# EAGLE board PCB 2D Proiect (EAGLE 9.7.0)
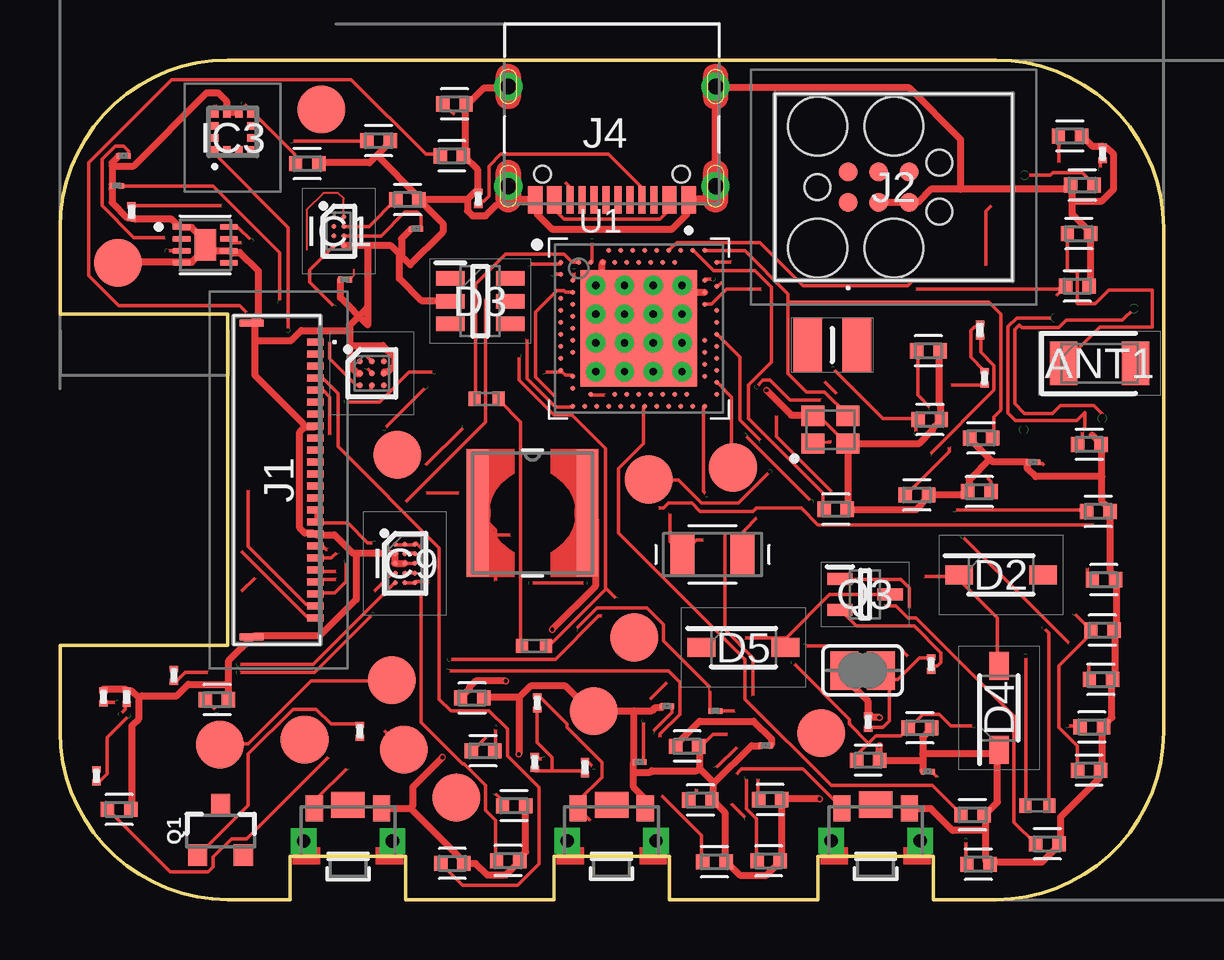
[diagram p0: board, top side]
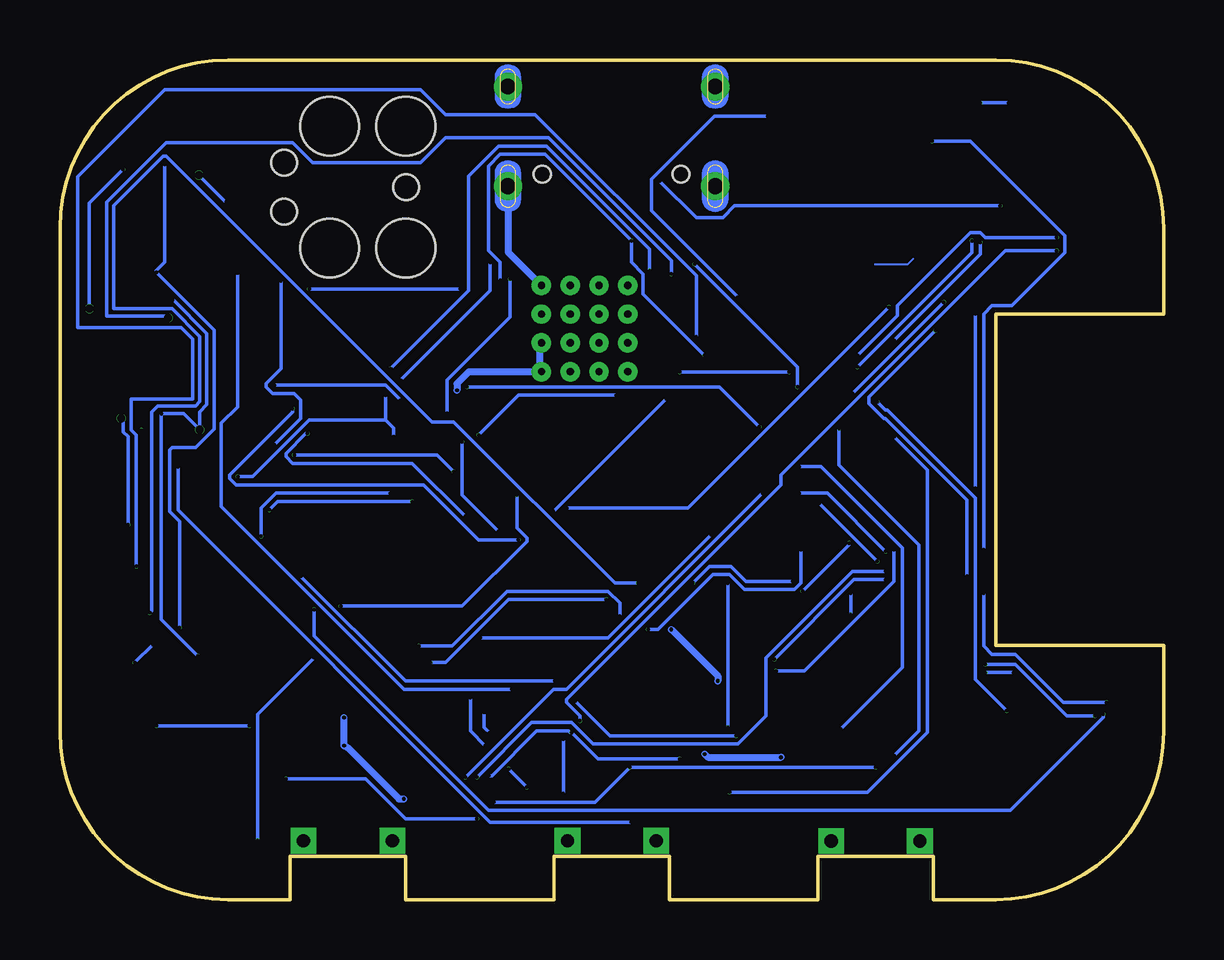
[diagram p1: board, bottom side, seen from below]

Size 46 x 35 mm. Coordinates in mm from the lower left corner, seen from the top.
Outline: 39,0 36.4,0 36.4,1.8 31.6,1.8 31.6,0 25.4,0 25.4,1.8 20.6,1.8 20.6,0 14.4,0 14.4,1.8 9.6,1.8 9.6,0 7,0 arc-90 0,7 0,10.6 7,10.6 7,24.4 0,24.4 0,28 arc-90 7,35 39,35 arc-90 46,28 46,7 arc-90 39,0
Copper layers (1*16): Top 0.035mm / dielectric 1.6mm / Bottom 0.035mm
Design rules "jlcpcb-2layers.dru *": minimum track width 0.14998125mm, minimum drill 0.15mm, track to track 5mil, track to pad 5mil, pad to pad 5mil, via to via 5mil, smd to smd 5mil, copper to edge 0.2mm, drill to drill 6mil, minimum pad ring 10mil, minimum via ring 0.003809375mm, stop-mask expansion 4mil, vias tented up to drill 0mil, thermal gap 10mil
Net classes: 1 Power: width 0.3 mm

## Footprints (pad centres in the part's own frame; a part is rotated, then mirrored left to right if it is on the bottom)
2450AT18B100E_ANTC3216X140N = smd 1.15 x 1.8: 1 -1.5,0; 2 1.5,0
CAPC1005X60 = smd 0.56 x 0.629: 1 -0.485,0; 2 0.485,0
GRM011R60J152KE01L_2_CAPC0201X13N = smd 0.22 x 0.23: 1 -0.185,0; 2 0.185,0
ESP32_C6_LIBRARY_5_SOD3716X135N = smd 1.15 x 0.8: 1 -1.75,0; 2 1.75,0
ESP32_C6_LIBRARY_3_SOT95P280X145-6N = smd 1.2 x 0.6: 1 -1.25,0.95; 2 -1.25,0; 3 -1.25,-0.95; 4 1.25,-0.95; 5 1.25,0; 6 1.25,0.95
BQ25180YBGR_BGA8C40P2X4_100X155X50 = smd 0.2 x 0.2: A1 -0.2,0.6; A2 0.2,0.6; B1 -0.2,0.2; B2 0.2,0.2; C1 -0.2,-0.2; C2 0.2,-0.2; D1 -0.2,-0.6; D2 0.2,-0.6
DRV2605YZFR_BGA9C50P3X3_144X144X62 = smd 0.25 x 0.25: A1 -0.5,0.5; A2 0,0.5; A3 0.5,0.5; B1 -0.5,0; B2 0,0; B3 0.5,0; C1 -0.5,-0.5; C2 0,-0.5; C3 0.5,-0.5
BMA423_BMA423 = smd 0.3 x 0.35: 1 -0.75,-0.775; 2 -0.25,-0.775; 3 0.25,-0.775; 4 0.75,-0.775; 7 0.75,0.775; 8 0.25,0.775; 9 -0.25,0.775; 10 -0.75,0.775 | smd 0.35 x 0.3: 5 0.775,-0.25; 6 0.775,0.25; 11 -0.775,0.25; 12 -0.775,-0.25
RT6160AWSC_BGA15C40P3X5_140X230X60 = smd 0.216 x 0.216: A1 -0.4,0.8; A2 0,0.8; A3 0.4,0.8; B1 -0.4,0.4; B2 0,0.4; B3 0.4,0.4; C1 -0.4,0; C2 0,0; C3 0.4,0; D1 -0.4,-0.4; D2 0,-0.4; D3 0.4,-0.4; E1 -0.4,-0.8; E2 0,-0.8; E3 0.4,-0.8
503480-2400_5034802400 = smd 0.3 x 0.7: 1 -5.75,1.525; 2 -5.25,1.525; 3 -4.75,1.525; 4 -4.25,1.525; 5 -3.75,1.525; 6 -3.25,1.525; 7 -2.75,1.525; 8 -2.25,1.525; 9 -1.75,1.525; 10 -1.25,1.525; 11 -0.75,1.525; 12 -0.25,1.525; 13 0.25,1.525; 14 0.75,1.525; 15 1.25,1.525; 16 1.75,1.525; 17 2.25,1.525; 18 2.75,1.525; 19 3.25,1.525; 20 3.75,1.525; 21 4.25,1.525; 22 4.75,1.525; 23 5.25,1.525; 24 5.75,1.525 | smd 0.3 x 1: MP1 -6.54,-1.125; MP2 6.54,-1.125
TC2030-IDC_TC2030IDC = smd 0.783 x 0.783: 1 -0.953,-0.635; 2 -0.953,0.635; 3 0.317,-0.635; 4 0.317,0.635; 5 1.588,-0.635; 6 1.588,0.635 | hole 2.451: -2.223,-2.54; -2.223,2.54; 0.952,-2.54; 0.952,2.54 | hole 1.067: -2.223,0; 2.857,-1.016; 2.857,1.016
KH-TYPE-C-16P_KINGHELM_KH-TYPE-C-16P = smd 0.6 x 1.15: A1_B12 -3.2,4.725; A4_B9 -2.4,4.725; A9_B4 2.4,4.725; A12_B1 3.2,4.725 | smd 0.3 x 1.15: A5 -1.25,4.725; A6 -0.25,4.725; A7 0.25,4.725; A8 1.25,4.725; B5 1.75,4.725; B6 0.75,4.725; B7 -0.75,4.725; B8 -1.75,4.725 | drill 0.65 pad 1.05: SH1 -4.32,0; SH2 4.32,0; SH3 -4.32,4.15; SH4 4.32,4.15 | hole 0.7: -2.89,3.65; 2.89,3.65
NORDIC_NRF_2_RESC0402_L = smd 0.5 x 0.6: 1 -0.5,0; 2 0.5,0
ESP32_C6_LIBRARY_2_IND_4828-WE-TPC_WRE = smd 0.9 x 5.3: 1 -2.286,0; 2 2.286,0
MLP2016SR47MT0S1_INDC2016X100N = smd 1.2 x 2.2: 1 -1.028,0; 2 1.028,0
ESP32_C6_LIBRARY_4_ESP32_C6_LIBRARY_4_ESP32_C6_LIBRARY_4_ESP32_C6_LIBRARY_4_ESP32_WROVER_SPARKFUN-DISCRETESEMI_SOT23-3 = smd 0.8 x 0.9: 1 -0.95,-1; 2 0.95,-1; 3 0,1.1
ESP32_C6_LIBRARY_6_SOT65P210X110-3N = smd 1.05 x 0.5: 1 -1.05,0.65; 2 -1.05,-0.65; 3 1.05,0
CPF0201D7K68C1_0201 = smd 0.35 x 0.25: 1 0,0.275; 2 0,-0.275
ESP32_C6_LIBRARY_7_JUMPER_SJ = smd 1.168 x 1.6: 1 -0.762,0; 2 0.762,0
2025-10-22_07-23-44_LIBRARY_SW_EVP-AKE31A_PAN = smd 0.711 x 1.092: 1 -1.4,-0.972; 2 1.4,-0.972 | drill 0.559 pad 0.914 square: 3 -1.848,0.381; 4 1.848,0.381 | smd 1.397 x 1.092: 5 0,-1.124
HECTOR_WATCH_1_TP20R = smd 2 x 2: TP 0,0
NORDIC_NRF_4_AQFN50P700X700X85_HS-74N = smd 4.85 x 4.85: P$74 0,0 | drill 0.3 pad 0.6: P$75 -1.8,1.8; P$76 -0.6,1.8; P$77 0.6,1.8; P$78 1.8,1.8; P$79 -1.8,0.6; P$80 -0.6,0.6; P$81 0.6,0.6; P$82 1.8,0.6; P$83 -1.8,-0.6; P$84 -0.6,-0.6; P$85 0.6,-0.6; P$86 1.8,-0.6; P$87 -1.8,-1.8; P$88 -0.6,-1.8; P$89 0.6,-1.8; P$90 1.8,-1.8 | smd 0.2 x 0.2: P$A8 -1.25,3.25; P$A10 -0.75,3.25; P$A12 -0.25,3.25; P$A14 0.25,3.25; P$A16 0.75,3.25; P$A18 1.25,3.25; P$A20 1.75,3.25; P$A22 2.25,3.25; P$A23 2.75,3.25; P$AA24 3.25,-2.25; P$AB2 -2.75,-2.5; P$AC5 -2,-2.75; P$AC9 -1,-2.75; P$AC11 -0.5,-2.75; P$AC13 0,-2.75; P$AC15 0.5,-2.75; P$AC17 1,-2.75; P$AC19 1.5,-2.75; P$AC21 2,-2.75; P$AC24 3.25,-2.75; P$AD2 -2.75,-3.25; P$AD4 -2.25,-3.25; P$AD6 -1.75,-3.25; P$AD8 -1.25,-3.25; P$AD10 -0.75,-3.25; P$AD12 -0.25,-3.25; P$AD14 0.25,-3.25; P$AD16 0.75,-3.25; P$AD18 1.25,-3.25; P$AD20 1.75,-3.25; P$AD22 2.25,-3.25; P$AD23 2.75,-3.25; P$B1 -3.25,2.75; P$B3 -2.5,2.75; P$B5 -2,2.75; P$B7 -1.5,2.75; P$B9 -1,2.75; P$B11 -0.5,2.75; P$B13 0,2.75; P$B15 0.5,2.75; P$B17 1,2.75; P$B19 1.5,2.75; P$B24 3.25,2.75; P$C1 -3.25,2.25; P$D2 -2.75,2; P$D23 2.75,2; P$E24 3.25,1.75; P$F2 -2.75,1.5; P$F23 2.75,1.5; P$G1 -3.25,1.25; P$H2 -2.75,1; P$H23 2.75,1; P$J1 -3.25,0.75; P$J24 3.25,0.75; P$K2 -2.75,0.5; P$L1 -3.25,0.25; P$L24 3.25,0.25; P$M2 -2.75,0; P$N1 -3.25,-0.25; P$N24 3.25,-0.25; P$P2 -2.75,-0.5; P$P23 2.75,-0.5; P$R1 -3.25,-0.75; P$R24 3.25,-0.75; P$T2 -2.75,-1; P$T23 2.75,-1; P$U1 -3.25,-1.25; P$U24 3.25,-1.25; P$V23 2.75,-1.5; P$W1 -3.25,-1.75; P$W24 3.25,-1.75; P$Y2 -2.75,-2; P$Y23 2.75,-2
ESP32_C6_LIBRARY_SON50P200X200X80-9N = smd 0.76 x 0.27: 1 -0.985,0.75; 2 -0.985,0.25; 3 -0.985,-0.25; 4 -0.985,-0.75; 5 0.985,-0.75; 6 0.985,-0.25; 7 0.985,0.25; 8 0.985,0.75 | smd 0.9 x 1.3: 9 0,0
NORDIC_NRF_BT-XTAL_2016_N = smd 0.95 x 0.85: 1 -0.725,-0.575; 2 0.725,-0.575; 3 0.725,0.575; 4 -0.725,0.575
XTAL330X1051X90N = smd 1 x 1.8: 1 -1.25,0; 2 1.25,0

## Placement (x,y rotation side)
ANT1  2450AT18B100E_2450AT18B100E  [2450AT18B100E_ANTC3216X140N]  43.33,22.35 0 top
C1  12pF  [CAPC1005X60]  38.32,17.01 0 top
C1-EP-DR  10uF  [CAPC1005X60]  17.18,8.4 0 top
C2  12pF  [CAPC1005X60]  38.39,19.24 0 top
C2-EP-DR  4.7uF/25V  [CAPC1005X60]  17.63,6.2 0 top
C3  1pF  [CAPC1005X60]  42.41,25.57 0 top
C4  1pF  [CAPC1005X60]  42.1,31.83 0 top
C5  100nF  [CAPC1005X60]  42.91,18.97 0 top
C6  4.7µF  [CAPC1005X60]  6.54,8.33 0 top
C7  100nF  [CAPC1005X60]  38.04,3.53 0 top
C8  100nF  [CAPC1005X60]  41.15,2.32 0 top
C9  820pF  [CAPC1005X60]  26.69,4.14 0 top
C10  100pF  [CAPC1005X60]  43.01,7.19 0 top
C11  100pF  [CAPC1005X60]  43.39,9.17 0 top
C12  100nF  [CAPC1005X60]  32.34,16.27 0 top
C13  100nF  [CAPC1005X60]  35.72,16.87 0 top
C14  4.7µF  [CAPC1005X60]  2.47,3.75 0 top
C15  1.0µF  [CAPC1005X60]  35.84,7.15 0 top
C16  47nF  [CAPC1005X60]  33.69,5.81 0 top
C17  12pF  [CAPC1005X60]  36.25,20.01 0 top
C18  12pF  [CAPC1005X60]  36.2,22.87 0 top
C19  100uF  [CAPC1005X60]  10.31,30.68 0 top
C20  4.7µF  [CAPC1005X60]  43.28,16.18 0 top
C21  4.7µF  [CAPC1005X60]  43.51,13.33 0 top
C22  1pF  [CAPC1005X60]  42.48,27.76 0 top
C23  GRM011R60J152KE01L_2_GRM011R60J152KE01L  [GRM011R60J152KE01L_2_CAPC0201X13N]  27.32,7.86 0 top
C24  10uF  [CAPC1005X60]  42.62,29.78 0 top
C25  22uF  [CAPC1005X60]  43.45,11.23 0 top
C27  GRM011R60J152KE01L_2_GRM011R60J152KE01L  [GRM011R60J152KE01L_2_CAPC0201X13N]  24.16,5.73 0 top
C29  GRM011R60J152KE01L_2_GRM011R60J152KE01L  [GRM011R60J152KE01L_2_CAPC0201X13N]  36.17,5.33 0 top
C30  GRM011R60J152KE01L_2_GRM011R60J152KE01L  [GRM011R60J152KE01L_2_CAPC0201X13N]  25.3,8.06 0 top
C31  GRM011R60J152KE01L_2_GRM011R60J152KE01L  [GRM011R60J152KE01L_2_CAPC0201X13N]  40.56,18.23 0 top
C32  GRM011R60J152KE01L_2_GRM011R60J152KE01L  [GRM011R60J152KE01L_2_CAPC0201X13N]  2.66,31 0 top
C33  22uF  [CAPC1005X60]  42.9,5.39 0 top
C34  GRM011R60J152KE01L_2_GRM011R60J152KE01L  [GRM011R60J152KE01L_2_CAPC0201X13N]  2.38,29.76 0 top
C37  GRM011R60J152KE01L_2_GRM011R60J152KE01L  [GRM011R60J152KE01L_2_CAPC0201X13N]  14.84,27.96 0 top
C38  GRM011R60J152KE01L_2_GRM011R60J152KE01L  [GRM011R60J152KE01L_2_CAPC0201X13N]  11.88,25.84 0 top
C39  10uF  [CAPC1005X60]  14.48,29.18 0 top
C42  GRM011R60J152KE01L_2_GRM011R60J152KE01L  [GRM011R60J152KE01L_2_CAPC0201X13N]  29.41,6.42 0 top
C43  4.7uF  [CAPC1005X60]  26.14,6.39 0 top
D2  ESP32_C6_LIBRARY_5_MBR0530  [ESP32_C6_LIBRARY_5_SOD3716X135N]  39.22,13.54 0 top
D3  ESP32_C6_LIBRARY_3_USBLC6-2SC6Y  [ESP32_C6_LIBRARY_3_SOT95P280X145-6N]  17.52,24.94 0 top
D4  ESP32_C6_LIBRARY_5_MBR0530  [ESP32_C6_LIBRARY_5_SOD3716X135N]  39.14,7.99 90 top
D5  ESP32_C6_LIBRARY_5_MBR0530  [ESP32_C6_LIBRARY_5_SOD3716X135N]  28.49,10.51 0 top
EPD_C1  1uF/50V  [CAPC1005X60]  18.93,3.91 0 top
EPD_C2  1uF/50V  [CAPC1005X60]  16.36,1.51 0 top
EPD_C5  0.1uF/50V  [CAPC1005X60]  18.68,1.62 0 top
EPD_C6  1uF/50V  [CAPC1005X60]  27.28,1.57 0 top
EPD_C7  1uF/50V  [CAPC1005X60]  29.6,4.16 0 top
EPD_C8  1uF/50V  [CAPC1005X60]  29.54,1.61 0 top
EPD_C9  1uF/50V  [CAPC1005X60]  38.29,1.47 0 top
EPD_C10  1uF/50V  [CAPC1005X60]  16.44,33.17 0 top
EPD_C11  1uF/50V  [CAPC1005X60]  16.33,31 0 top
EPD_C12  1uF/50V  [CAPC1005X60]  13.28,31.64 0 top
IC1  BQ25180YBGR_BQ25180YBGR  [BQ25180YBGR_BGA8C40P2X4_100X155X50]  11.62,27.86 0 top
IC2  DRV2605YZFR_DRV2605YZFR  [DRV2605YZFR_BGA9C50P3X3_144X144X62]  13,21.94 0 top
IC3  BMA423_BMA423  [BMA423_BMA423]  7.2,32 0 top
IC9  RT6160AWSC_RT6160AWSC  [RT6160AWSC_BGA15C40P3X5_140X230X60]  14.38,14.01 0 top
J1  503480-2400_503480-2400  [503480-2400_5034802400]  9.12,17.49 270 top
J2  TC2030-IDC_TC2030-IDC  [TC2030-IDC_TC2030IDC]  33.8,29.7 0 top
J4  KH-TYPE-C-16P_KH-TYPE-C-16P  [KH-TYPE-C-16P_KINGHELM_KH-TYPE-C-16P]  23.01,33.89 180 top
L1  3.9nH  [NORDIC_NRF_2_RESC0402_L]  40.75,3.92 0 top
L2  10µH  [NORDIC_NRF_2_RESC0402_L]  17.79,20.87 0 top
L3  15nH  [NORDIC_NRF_2_RESC0402_L]  19.77,10.57 0 top
L5  ESP32_C6_LIBRARY_2_744043680IND_4828-WE-TPC_WRE  [ESP32_C6_LIBRARY_2_IND_4828-WE-TPC_WRE]  19.69,16.12 0 top
L7  MLP2016SR47MT0S1_FTC252012SR47MBCA  [MLP2016SR47MT0S1_INDC2016X100N]  32.19,23.12 0 top
Q1  20V/4.2A/52mΩ/1.4W  [ESP32_C6_LIBRARY_4_ESP32_C6_LIBRARY_4_ESP32_C6_LIBRARY_4_ESP32_C6_LIBRARY_4_ESP32_WROVER_SPARKFUN-DISCRETESEMI_SOT23-3]  6.7,2.85 0 top
Q3  ESP32_C6_LIBRARY_6_SI1308EDL-T1-GE3  [ESP32_C6_LIBRARY_6_SOT65P210X110-3N]  33.56,12.72 0 top
R1_EP_DR  CPF0201D7K68C1_CPF0201D7K68C1  [CPF0201D7K68C1_0201]  36.31,9.81 0 top
R1_USB  CPF0201D7K68C1_CPF0201D7K68C1  [CPF0201D7K68C1_0201]  17.44,29.23 0 top
R2  CPF0201D7K68C1_CPF0201D7K68C1  [CPF0201D7K68C1_0201]  1.52,5.16 0 top
R2_EP_DR  CPF0201D7K68C1_CPF0201D7K68C1  [CPF0201D7K68C1_0201]  2.78,8.44 0 top
R2_USB  CPF0201D7K68C1_CPF0201D7K68C1  [CPF0201D7K68C1_0201]  2.99,28.67 0 top
R3  CPF0201D7K68C1_CPF0201D7K68C1  [CPF0201D7K68C1_0201]  1.81,8.45 0 top
R4  CPF0201D7K68C1_CPF0201D7K68C1  [CPF0201D7K68C1_0201]  4.74,9.34 0 top
R5  CPF0201D7K68C1_CPF0201D7K68C1  [CPF0201D7K68C1_0201]  19.79,5.72 0 top
R7  CPF0201D7K68C1_CPF0201D7K68C1  [CPF0201D7K68C1_0201]  21.89,5.5 0 top
R8  CPF0201D7K68C1_CPF0201D7K68C1  [CPF0201D7K68C1_0201]  19.89,8.2 0 top
R9  CPF0201D7K68C1_CPF0201D7K68C1  [CPF0201D7K68C1_0201]  43.46,31.1 0 top
R17  CPF0201D7K68C1_CPF0201D7K68C1  [CPF0201D7K68C1_0201]  38.35,23.74 0 top
R18  CPF0201D7K68C1_CPF0201D7K68C1  [CPF0201D7K68C1_0201]  38.54,21.75 0 top
R_PWR_EPD  CPF0201D7K68C1_CPF0201D7K68C1  [CPF0201D7K68C1_0201]  12.5,7.01 0 top
R_TYPE_SEL  CPF0201D7K68C1_CPF0201D7K68C1  [CPF0201D7K68C1_0201]  33.69,7.4 0 top
SJ1  [ESP32_C6_LIBRARY_7_JUMPER_SJ]  33.46,9.55 0 top
SW_DN  2025-10-22_07-23-44_LIBRARY_EVP-AKE31ASW_EVP-AKE31A_PAN  [2025-10-22_07-23-44_LIBRARY_SW_EVP-AKE31A_PAN]  12,2.83 180 top
SW_ENT  2025-10-22_07-23-44_LIBRARY_EVP-AKE31ASW_EVP-AKE31A_PAN  [2025-10-22_07-23-44_LIBRARY_SW_EVP-AKE31A_PAN]  23,2.83 180 top
SW_UP  2025-10-22_07-23-44_LIBRARY_EVP-AKE31ASW_EVP-AKE31A_PAN  [2025-10-22_07-23-44_LIBRARY_SW_EVP-AKE31A_PAN]  34,2.83 180 top
TP_3.3V  HECTOR_WATCH_1_TPTP20R  [HECTOR_WATCH_1_TP20R]  16.52,4.25 0 top
TP_BAT_GND  HECTOR_WATCH_1_TPTP20R  [HECTOR_WATCH_1_TP20R]  22.25,7.86 0 top
TP_GND  HECTOR_WATCH_1_TPTP20R  [HECTOR_WATCH_1_TP20R]  2.42,26.55 0 top
TP_ON  HECTOR_WATCH_1_TPTP20R  [HECTOR_WATCH_1_TP20R]  31.72,6.95 0 top
TP_OP  HECTOR_WATCH_1_TPTP20R  [HECTOR_WATCH_1_TP20R]  10.9,32.95 0 top
TP_RESET  HECTOR_WATCH_1_TPTP20R  [HECTOR_WATCH_1_TP20R]  14.07,18.54 0 top
TP_SCL  HECTOR_WATCH_1_TPTP20R  [HECTOR_WATCH_1_TP20R]  24.54,17.51 0 top
TP_SDA  HECTOR_WATCH_1_TPTP20R  [HECTOR_WATCH_1_TP20R]  14.34,6.25 0 top
TP_SWDCLK  HECTOR_WATCH_1_TPTP20R  [HECTOR_WATCH_1_TP20R]  28.05,18.01 0 top
TP_SWDIO  HECTOR_WATCH_1_TPTP20R  [HECTOR_WATCH_1_TP20R]  23.93,10.93 0 top
TP_SWO  HECTOR_WATCH_1_TPTP20R  [HECTOR_WATCH_1_TP20R]  6.67,6.45 0 top
TP_VBAT  HECTOR_WATCH_1_TPTP20R  [HECTOR_WATCH_1_TP20R]  10.2,6.67 0 top
TP_VREG  HECTOR_WATCH_1_TPTP20R  [HECTOR_WATCH_1_TP20R]  13.84,9.14 0 top
U1  NORDIC_NRF_4_NRF52840_QF  [NORDIC_NRF_4_AQFN50P700X700X85_HS-74N]  24.13,23.8 0 top
U3  ESP32_C6_LIBRARY_MAX17048G+T10  [ESP32_C6_LIBRARY_SON50P200X200X80-9N]  6.06,27.29 0 top
X1  32MHZ  [NORDIC_NRF_BT-XTAL_2016_N]  32.11,19.58 0 top
X2  FC-135  [XTAL330X1051X90N]  27.2,14.39 0 top

## Library data of the parts
ANT1 = InkTime_v5; ARROW_PART_NUMBER: 2450AT18B100E; ARROW_PRICE-STOCK: https://www.arrow.com/en/products/2450at18b100e/johanson-dielectrics?utm_currency=USD&region=nac; DESCRIPTION: Antennas 2.45GHz ANTENNA; HEIGHT: 1.4mm; MANUFACTURER_NAME: JOHANSON TECHNOLOGY; MANUFACTURER_PART_NUMBER: 2450AT18B100E; MOUSER_PART_NUMBER: 609-2450AT18B100E; MOUSER_PRICE-STOCK: https://www.mouser.co.uk/ProductDetail/Johanson-Technology/2450AT18B100E?qs=yCnrNFeXz%252Bh5MFsFIXGZGA%3D%3D
C1 C1-EP-DR C2 C2-EP-DR C3-C22 C24 C25 C33 C39 C43 EPD_C1 EPD_C2 EPD_C5-EPD_C12 = Tinkercad; CATEGORY: Capacitor
C23 C27 C34 C42 = InkTime_v5; AVAILABILITY: In Stock; CAP: 0.1uF; CHECK_PRICES: https://www.snapeda.com/parts/GRM011R60J152KE01L/Murata/view-part/?ref=eda; DESCRIPTION: SMD Capacitor X5R(EIA) with Capacitance: 1500pF Tol. 10%. Rated Voltage: 6.3Vdc; MF: Murata; MP: GRM011R60J152KE01L; PACKAGE: 0201 Murata; PRICE: None; SNAPEDA_LINK: https://www.snapeda.com/parts/GRM011R60J152KE01L/Murata/view-part/?ref=snap
C29-C32 C37 C38 = InkTime_v5; AVAILABILITY: In Stock; CAP: 1uF; CHECK_PRICES: https://www.snapeda.com/parts/GRM011R60J152KE01L/Murata/view-part/?ref=eda; DESCRIPTION: SMD Capacitor X5R(EIA) with Capacitance: 1500pF Tol. 10%. Rated Voltage: 6.3Vdc; MF: Murata; MP: GRM011R60J152KE01L; PACKAGE: 0201 Murata; PRICE: None; SNAPEDA_LINK: https://www.snapeda.com/parts/GRM011R60J152KE01L/Murata/view-part/?ref=snap
D2 D4 D5 = InkTime_v5; AVAILABILITY: In Stock; CHECK_PRICES: https://www.snapeda.com/parts/MBR0530/Onsemi/view-part/?ref=eda; DESCRIPTION: Diode Schottky 30 V 500mA Surface Mount SOD-123; MF: ON Semiconductor; MP: MBR0530; PACKAGE: SOD-123-2 ON Semiconductor; PRICE: None; PURCHASE-URL: https://www.snapeda.com/api/url_track_click_mouser/?unipart_id=179458&manufacturer=ON Semiconductor&part_name=MBR0530&search_term=None; SHORT_NAME: MBR0530; SNAPEDA_LINK: https://www.snapeda.com/parts/MBR0530/Onsemi/view-part/?ref=snap
D3 = InkTime_v5; AVAILABILITY: In Stock; CHECK_PRICES: https://www.snapeda.com/parts/USBLC6-2SC6Y/STMicroelectronics/view-part/?ref=eda; DESCRIPTION: 17V Clamp 5A (8/20µs) Ipp Tvs Diode Surface Mount SOT-23-6; MF: STMicroelectronics; MP: USBLC6-2SC6Y; PACKAGE: SOT-23-6 STMicroelectronics; PRICE: None; SHORT_NAME: USBLC6-2SC6Y; SNAPEDA_LINK: https://www.snapeda.com/parts/USBLC6-2SC6Y/STMicroelectronics/view-part/?ref=snap
IC1 = InkTime_v5; ARROW_PART_NUMBER: BQ25180YBGR; ARROW_PRICE-STOCK: https://www.arrow.com/en/products/bq25180ybgr/texas-instruments?utm_currency=USD&region=nac; DESCRIPTION: Charger IC Lithium Ion/Polymer, Lithium Iron Phosphate 8-DSBGA (1.6x1.1); HEIGHT: 0.5mm; MANUFACTURER_NAME: Texas Instruments; MANUFACTURER_PART_NUMBER: BQ25180YBGR; MOUSER_PART_NUMBER: 595-BQ25180YBGR; MOUSER_PRICE-STOCK: https://www.mouser.co.uk/ProductDetail/Texas-Instruments/BQ25180YBGR?qs=doiCPypUmgEWjAK%252BJAX6Tw%3D%3D
IC2 = InkTime_v5; ARROW_PART_NUMBER: DRV2605YZFR; ARROW_PRICE-STOCK: https://www.arrow.com/en/products/drv2605yzfr/texas-instruments?region=nac; DESCRIPTION: Haptic Driver for ERM/LRA with Built-In Library and Smart Loop Architecture; HEIGHT: 0.625mm; MANUFACTURER_NAME: Texas Instruments; MANUFACTURER_PART_NUMBER: DRV2605YZFR; SHORT_NAME: DRV2605YZFR
IC3 = InkTime_v5; ARROW_PART_NUMBER: BMA423; ARROW_PRICE-STOCK: https://www.arrow.com/en/products/bma423/bosch; DESCRIPTION: Accelerometers Triaxial low-g 12bit Acceleration Sensor; HEIGHT: 1mm; MANUFACTURER_NAME: BOSCH; MANUFACTURER_PART_NUMBER: BMA423; MOUSER_PART_NUMBER: 262-BMA423; MOUSER_PRICE-STOCK: https://www.mouser.co.uk/ProductDetail/Bosch-Sensortec/BMA423?qs=HXFqYaX1Q2xC%252BSgeGoX3mg%3D%3D
IC9 = InkTime_v5; DESCRIPTION: Buck-Boost Regulator Positive Output Step-Up/Step-Down I2C DC-DC Controller IC 15-WL-CSP (BSC) (1.4x2.3); HEIGHT: 0.6mm; MANUFACTURER_NAME: RICHTEK; MANUFACTURER_PART_NUMBER: RT6160AWSC; MOUSER_PART_NUMBER: 835-RT6160AWSC; MOUSER_PRICE-STOCK: https://www.mouser.co.uk/ProductDetail/Richtek/RT6160AWSC?qs=amGC7iS6iy%2FLd9PSoixZXQ%3D%3D
J1 = InkTime_v5; DESCRIPTION: FFC & FPC Connectors 0.5mm FPC RA SMT Dual Contact 24Ckt; HEIGHT: 1.87mm; MANUFACTURER_NAME: Molex; MANUFACTURER_PART_NUMBER: 503480-2400; MOUSER_PART_NUMBER: 538-503480-2400; MOUSER_PRICE-STOCK: https://www.mouser.co.uk/ProductDetail/Molex/503480-2400?qs=OAhjpuo3Vu7efIoxFh9AOw%3D%3D
J2 = InkTime_v5; DESCRIPTION: CABLE ADAPTER 6 POS; HEIGHT: 19mm; MANUFACTURER_NAME: Tag Connect; MANUFACTURER_PART_NUMBER: TC2030-IDC
J4 = InkTime_v5; AVAILABILITY: Not in stock; CHECK_PRICES: https://www.snapeda.com/parts/KH-TYPE-C-16P/Kinghelm/view-part/?ref=eda; MF: kinghelm; MP: KH-TYPE-C-16P; PACKAGE: None; PRICE: None; SHORT_NAME: KH-TYPE-C-16P; SNAPEDA_LINK: https://www.snapeda.com/parts/KH-TYPE-C-16P/Kinghelm/view-part/?ref=snap
L1-L3 SJ1 TP_3.3V TP_BAT_GND TP_GND TP_ON TP_OP TP_RESET TP_SCL TP_SDA TP_SWDCLK TP_SWDIO TP_SWO TP_VBAT TP_VREG U1 X1 = InkTime_v5
L5 = InkTime_v5; COPYRIGHT: Copyright (C) 2024 Ultra Librarian. All rights reserved.; MANUFACTURER_PART_NUMBER: 744043680; MFR_NAME: Wurth Electronics; VAL: 68uH
L7 = InkTime_v5; DESCRIPTION: SMD / SMT Inductors (Coils), L=0.47?H, L x W x T :; HEIGHT: 1mm; JLCPCB: https://jlcpcb.com/partdetail/6763488-FTC252012SR47MBCA/C5832368; MANUFACTURER_NAME: TDK; MANUFACTURER_PART_NUMBER: FTC252012SR47MBCA; SHORT_NAME: FTC252012SR47MBCA
Q1 = InkTime_v5; PROD_ID: TRAN-14388; SHORT_NAME: DMG2305UX-7
Q3 = InkTime_v5; AVAILABILITY: In Stock; CHECK_PRICES: https://www.snapeda.com/parts/SI1308EDL-T1-GE3/Vishay+Siliconix/view-part/?ref=eda; DESCRIPTION: Si1308EDL-T1-GE3 N-channel MOSFET Transistor, 1.5 A, 30 V, 3-Pin SC-70 | Siliconix / Vishay SI1308EDL-T1-GE3; MF: Vishay Siliconix; MP: SI1308EDL-T1-GE3; PACKAGE: SOT-323 Vishay Semiconductor; PRICE: None; PURCHASE-URL: https://www.snapeda.com/api/url_track_click_mouser/?unipart_id=274603&manufacturer=Vishay Siliconix&part_name=SI1308EDL-T1-GE3&search_term=None; SHORT_NAME: SI1308EDL-T1-GE3; SNAPEDA_LINK: https://www.snapeda.com/parts/SI1308EDL-T1-GE3/Vishay+Siliconix/view-part/?ref=snap
R1_EP_DR = InkTime_v5; VAL: 0.47
R1_USB R2_USB = InkTime_v5; VAL: 5K1
R2-R4 = InkTime_v5; VAL: 0
R2_EP_DR R5 R7-R9 R_PWR_EPD = InkTime_v5; VAL: 10K
R17 R18 = InkTime_v5; VAL: 3K3
R_TYPE_SEL = InkTime_v5; VAL: 2.2
SW_DN SW_ENT SW_UP = InkTime_v5; COPYRIGHT: Copyright (C) 2025 Ultra Librarian. All rights reserved.; DIGI-KEY_PART_NUMBER_1: P123437TR-ND; DIGI-KEY_PART_NUMBER_2: P123437CT-ND; DIGI-KEY_PART_NUMBER_3: P123437DKR-ND; MANUFACTURER_NAME: Panasonic; MANUFACTURER_PART_NUMBER: EVP-AKE31A
U3 = InkTime_v5; AVAILABILITY: In Stock; CHECK_PRICES: https://www.snapeda.com/parts/MAX17048G+T10/Analog+Devices/view-part/?ref=eda; DESCRIPTION: 3µA 1-Cell/2-Cell Fuel Gauge with ModelGauge; MF: Analog Devices; MP: MAX17048G+T10; PACKAGE: TDFN-8 Maxim; PRICE: None; PURCHASE-URL: https://www.snapeda.com/api/url_track_click_mouser/?unipart_id=329239&manufacturer=Analog Devices&part_name=MAX17048G+T10&search_term=None; SHORT_NAME: MAX17048G+T10; SNAPEDA_LINK: https://www.snapeda.com/parts/MAX17048G+T10/Analog+Devices/view-part/?ref=snap
X2 = Frequency-Source; CATEGORY: Crystals; DATASHEET: https://download.epsondevice.com/td/pdf/app/FC-135_en.pdf; DESCRIPTION: 32.768 kHz ±20 ppm Crystal 12.5 pF 70 kOhms 2-SMD No Lead; FREQUENCY: 32.768 kHz; FREQUENCY_STABILITY: NA; LOAD_CAPACITANCE: 12.5 pF; MANUFACTURER: EPSON; MPN: FC-135 32.7680KA-A5; OPERATING_TEMPERATURE: -40°C ~ 85°C; PACKAGE_SIZE: 2-SMD No Lead; PACKAGE_TYPE: Surface Mount; PART_STATUS: Active; ROHS: Compliant; SERIES: FC-135; SUBCATEGORY: Oscillators; TOLERANCE: ±20 ppm; TYPE: Resonators

## Nets
3V3/1.7D [Power]: Q1.2
3V3/2.4A [Power]: TP_3.3V.TP
ALERT/1.6C: U3.5
ALERT/2.5C: U1.P$J24
D+/1.5D: D3.4
D+/2.7D: U1.P$AD6
D-/1.5D: D3.6
D-/2.7D: U1.P$AD4
DN: D3.1
DP: D3.3
EPD_3V3 [Power]: C1-EP-DR.1 L5.2
EPD_BUSY/1.5D: J1.9
EPD_BUSY/2.2D: U1.P$AD12
EPD_CS/1.4C: J1.12
EPD_CS/2.2D: U1.P$K2
EPD_DC/1.5D: J1.11
EPD_DC/2.2D: U1.P$AD10
EPD_RST/1.5D: J1.10
EPD_RST/2.2D: U1.P$AC11
GDR: Q3.1 R2_EP_DR.2
GND [Power]: C1-EP-DR.2 C1.1 C2.1 C3.2 C4.2 C5.2 C6.2 C7.2 C8.2 C9.2 C10.2 C11.2 C12.2 C13.2 C14.2 C15.2 C16.2 C17.2 C18.2 C19.2 C20.2 C21.2 C22.2 C23.2 C24.1 C25.2 C27.1 C29.1 C30.1 C31.1 C32.1 C33.2 C34.1 C37.1 C38.1 C39.2 C42.1 C43.2 D3.2 D4.1 EPD_C1.2 EPD_C2.2 EPD_C5.2 EPD_C6.2 EPD_C7.2 EPD_C8.2 EPD_C9.2 EPD_C10.2 EPD_C11.2 EPD_C12.2 IC1.D2 IC2.B1 IC2.B3 IC3.8 IC3.9 IC9.B1 IC9.C1 IC9.C2 IC9.C3 J1.8 J1.17 J1.MP1 J1.MP2 J2.3 J2.5 J4.A1_B12 J4.A12_B1 J4.SH1 J4.SH2 J4.SH3 J4.SH4 R1_USB.1 R2_EP_DR.1 R2_USB.2 R3.1 R9.1 R_TYPE_SEL.1 SJ1.1 SW_DN.1 SW_ENT.1 SW_UP.1 TP_BAT_GND.TP TP_GND.TP U1.P$74 U1.P$75 U1.P$76 U1.P$77 U1.P$78 U1.P$79 U1.P$80 U1.P$81 U1.P$82 U1.P$83 U1.P$84 U1.P$85 U1.P$86 U1.P$87 U1.P$88 U1.P$89 U1.P$90 U1.P$B7 U1.P$F23 U3.1 U3.4 U3.6 U3.9 X1.2 X1.4
HAPTIC_EN/1.4C: IC2.A1
HAPTIC_EN/2.6A: U1.P$U1
IMU_INT1: IC3.5
IMU_INT2: IC3.6
LX1: L7.1
LX2: L7.2
MOSI/1.5B: J1.14
MOSI/2.2D: U1.P$B13
N$1: IC9.D1 R4.2
N$2: IC1.D1 R9.2
N$3: R4.1
N$4: IC9.D2 IC9.D3
N$5: IC9.E1 R2.2
N$6: C25.1 C33.1 IC9.E2 IC9.E3
N$7: R17.1 R18.1
N$8: IC9.B2 IC9.B3
N$9: C23.1 C24.2 IC9.A1 IC9.A2 IC9.A3
N$10: R17.2 TP_SCL.TP
N$11: R18.2 TP_SDA.TP
N$12: IC3.3
N$13: IC3.2
N$14: IC3.1 R3.2
N$15: IC3.12
N$16: J2.1
N$17: C19.1 IC3.7 IC3.10
N$18: J2.2
N$19: J2.6
N$20: J2.4
N$21: C8.1 U1.P$AD23
N$23: U1.P$AC24
N$24: C9.1 U1.P$N24
N$25: C2.2 U1.P$A23 X1.3
N$26: C3.1 L1.1 U1.P$H23
N$27: ANT1.1 C4.1 C22.1 L1.2
N$28: C2-EP-DR.2 D5.2 L5.1 Q3.3
N$29: C1.2 U1.P$B24 X1.1
N$30: C11.1 U1.P$D23
N$31: U1.P$AD22
N$32: C20.1 U1.P$AC5
N$33: C6.1 U1.P$W1 U1.P$Y2
N$34: C14.1 U1.P$B1
N$35: U1.P$T2
N$36: C12.1 U1.P$A22
N$37: U1.P$P2
N$38: U1.P$N1
N$39: C7.1 U1.P$AD14
N$40: U1.P$AC13
N$41: U1.P$M2
N$42: U1.P$L1
N$43: L2.2 L3.1
N$44: C10.1 C15.1 C16.1 L3.2 U1.P$B5 U1.P$E24
N$45: C13.1 U1.P$A18
N$46: C2-EP-DR.1 D2.1 D4.2
N$47: C18.1 U1.P$F2 X2.1
N$48: C21.1 U1.P$AD2
N$49: C17.1 U1.P$D2 X2.2
N$50: C5.1 U1.P$C1
N$51: R2.1
N$52: R1_EP_DR.1 R_TYPE_SEL.2 SJ1.2
N$53: R_PWR_EPD.2
N$54: J1.2
N$55: Q1.3
N$56: J1.3
N$57: EPD_C2.1 J1.4
N$58: EPD_C1.1 J1.5
N$59: J4.A4_B9 J4.A9_B4
N$60: C27.2 U3.2 U3.3
N$61: J4.B7
N$62: L2.1 U1.P$B3
N$63: J4.B6
N$64: D3.5
N$65: J4.B5 R2_USB.1
N$66: J4.A5 R1_USB.2
N$67: J4.A6
N$68: EPD_C5.1 J1.15 J1.16
N$69: J4.A7
N$70: EPD_C6.1 J1.18
N$71: EPD_C7.1 J1.19
N$72: EPD_C8.1 J1.20
N$73: EPD_C9.1 J1.21
N$74: EPD_C10.1 J1.22
N$75: EPD_C11.1 J1.23
N$76: EPD_C12.1 J1.24
N$78: C34.2 IC2.C2
N$79: IC2.C3
N$81: C32.2 IC2.A2
N$82: IC2.A3
N$84: R5.2 R7.2 R8.2
OUT+: TP_OP.TP
OUT-: TP_ON.TP
P0.04: U1.P$J1
P0.09: U1.P$L24
P0.13/1.5D: C30.2 R5.1 SW_UP.2
P0.13/2.6C: U1.P$AD8
P0.14/1.5D: C31.2 R8.1 SW_ENT.2
P0.14/2.7C: U1.P$AC9
P0.19: U1.P$AC15
P0.20: U1.P$AD16
P0.21: U1.P$AC17
P0.22: U1.P$AD18
P0.23: U1.P$AC19
P0.24: U1.P$AD20
P0.25: U1.P$AC21
P0.26: U1.P$G1
P0.27: U1.P$H2
P0.28: U1.P$B11
P0.29: U1.P$A10
P0.30: U1.P$B9
P0.31: U1.P$A8
P1.01/1.6C: Q1.1 R_PWR_EPD.1
P1.01/2.4B: U1.P$Y23
P1.02/1.6C: C29.2 R7.1 SW_DN.2
P1.02/2.8C: U1.P$W24
P1.03: U1.P$V23
P1.04: U1.P$U24
P1.05: U1.P$T23
P1.06: U1.P$R24
P1.07: U1.P$P23
P1.09: U1.P$R1
P1.10: U1.P$A20
P1.11: U1.P$B19
P1.12: U1.P$B17
P1.13: U1.P$A16
P1.14: U1.P$B15
P1.15: U1.P$A14
PMIC_INT: IC1.A1
PREVGH: D5.1
PREVGL: D2.2
RESE: Q3.2 R1_EP_DR.2
RESET: TP_RESET.TP
SCK/1.5B: J1.13
SCK/2.2D: U1.P$A12
SCL/1.4C: IC2.C1 U3.7
SCL/2.4C: IC1.B1
SDA/1.4C: IC2.B2 U3.8
SDA/2.4C: IC1.C1
SWDCLK: TP_SWDCLK.TP U1.P$AA24
SWDIO: TP_SWDIO.TP
SWO: TP_SWO.TP TP_VREG.TP
VBAT/1.2A [Power]: TP_VBAT.TP
VBAT/2.5C [Power]: C37.2 IC1.C2
VBUS/1.5D [Power]: C42.2 C43.1
VBUS/2.6D [Power]: C38.2 IC1.A2
VREG [Power]: C39.1 IC1.B2

## Tracks (layer width: path | path; a pad name or v marks a point on that pad's centre or on a via)
EPD_3V3  (via drill 0.15)
  Top 0.3: v18.58,9.11 17.33,9.11 17.05,8.84 17.05,8.77 16.71,8.42 C1-EP-DR.1 | v20.52,11.26 22.32,13.06 22.32,15.83 22.04,16.11 L5.2
  Bottom 0.3: v18.58,9.11 18.58,9.32 v20.52,11.26
GDR  (via drill 0.15)
  Top 0.15: v2.51,7.73 2.72,7.94 2.72,8.14 R2_EP_DR.2 | v35.4,12.09 35.4,12.99 35.06,13.34 32.57,13.34 Q3.1
  Bottom 0.15: v2.51,7.73 2.51,7.59 6.39,3.71 28.13,3.71 35.4,10.98 v35.4,12.09
GND  (via drill 0.15, 0.35)
  Top 0.152: C23.2 28.27,7.86 v28.32,7.91 | v28.02,6.88 27.22,6.88 26.68,6.34 | IC9.C2 IC9.C3 | X1.2 32.78,19.01 31.63,20.16
  Top 0.3: v29.45,21.23 30.49,20.19 31.39,20.19 X1.4 31.63,20.16 | U1.P$B7 22.59,26.49 22.59,25.87 22.39,25.66 U1.P$74 | 25.99,25.59 26.26,25.32 26.82,25.32 U1.P$F23 | U1.P$74 22.39,23.17 22.39,22.06 U1.P$87 22.52,22.06 23.49,22.06 U1.P$88 23.63,22.06 24.67,22.06 U1.P$89 | U1.P$83 22.39,23.24 U1.P$74 | U1.P$79 22.39,24.42 22.94,24.97 U1.P$74 | U1.P$75 22.39,25.59 U1.P$74 | U1.P$84 23.49,23.24 23.36,23.38 U1.P$74 | U1.P$85 24.67,23.24 24.19,23.72 U1.P$74 | U1.P$80 23.56,24.42 U1.P$74 | U1.P$76 23.49,25.59 23.01,25.11 U1.P$74 | U1.P$81 24.74,24.42 U1.P$74 | U1.P$77 24.74,25.59 25.29,25.04 U1.P$74 | U1.P$74 25.43,24.9 25.92,24.42 U1.P$82 25.99,24.28 25.99,23.24 U1.P$86 | 25.99,25.59 U1.P$78 | 25.99,25.59 U1.P$74 | 17.4,29.54 17.4,30.44 16.85,30.99 EPD_C11.2 16.92,31.13 16.92,33.14 EPD_C10.2 17.05,33.21 17.68,33.83 18.65,33.83 J4.SH2 | 17.4,29.54 R1_USB.1 | 16.99,29.19 16.99,28.71 17.19,28.5 17.75,28.5 18.72,29.47 J4.SH4 18.72,29.68 19.2,29.19 19.75,29.19 J4.A12_B1 19.89,29.06 19.89,28.57 20.52,27.95 25.5,27.95 26.13,28.57 26.13,29.06 J4.A1_B12 26.26,29.19 26.82,29.19 27.3,29.68 J4.SH3 27.3,29.89 27.3,33.83 J4.SH1 27.44,33.83 35.4,33.83 37.55,31.69 37.55,29.61 | 16.99,29.19 17.26,29.47 17.4,29.54 | 13.21,31.03 13.8,31.62 EPD_C12.2 | 13.21,31.03 12.9,30.72 10.82,30.72 C19.2 | 12.83,27.26 13.8,27.26 14.15,26.91 | 12.83,27.26 11.86,27.26 IC1.D2 | 14.24,26.82 14.59,26.46 15.96,27.83 15.96,28.18 C39.2 | 14.24,26.82 14.15,26.91 | 12.83,27.26 12.83,24.76 | 12.83,24.76 12.83,23.96 11.7,25.09 C38.1 | 12.07,23.72 12.07,23.93 12.76,24.62 12.83,24.76 | 12.07,23.72 12.07,23.1 | 12.07,23.1 12.07,22.27 12.42,21.92 12.48,21.92 IC2.B1
  Top 0.3: 12.07,23.1 13.45,23.1 13.94,22.62 13.94,22.27 13.66,21.99 13.52,21.99 IC2.B3 | D3.2 16.22,24.97 15.06,24.97 14.15,25.88 14.15,26.91 | C37.1 14.24,27.54 14.24,26.82 | 13.21,31.03 14.98,29.26 C39.2 | 16.99,29.19 15.12,29.19 C39.2 | 7.01,8.97 7.01,9.94 7.98,10.91 J1.MP2 8.12,10.98 10.82,10.98 12.35,12.51 12.35,14.45 | 7.01,8.97 7.01,8.35 C6.2 | R3.1 1.82,8.77 2.72,8.77 R2_EP_DR.1 2.93,8.7 3,8.7 3.27,8.42 | 3.27,8.42 3.27,7.52 3,7.24 3,3.78 C14.2 | 7.01,8.97 5.35,8.97 4.87,8.49 3.41,8.49 3.27,8.42 | IC3.8 7.43,32.79 7.01,32.79 IC3.9 6.94,32.93 6.94,33.28 6.6,33.63 6.11,33.63 3.07,30.58 2.17,30.58 | 2.17,30.58 2.17,30.72 2.44,30.99 C32.1 | 2.17,30.58 2.17,29.82 C34.1 2.17,29.61 2.17,29.06 2.79,28.43 2.93,28.43 R2_USB.2 3.14,28.36 4.66,28.36 4.94,28.09 U3.1 5.08,28.02 5.49,28.02 6.11,27.39 U3.9 | 13.94,14.38 13.94,14.03 IC9.C1 IC9.C2 | 13.94,14.38 IC9.B1 | 12.35,14.45 12.21,14.45 11.45,15.21 10.68,15.21 J1.17 10.55,15.28 10.2,15.28 9.99,15.48 9.99,19.5 10.2,19.71 | 12.35,14.45 13.8,14.45 13.94,14.38 | 10.2,19.71 10.61,19.71 J1.8 | U3.9 6.04,27.26 6.04,27.12 5.49,26.56 5.08,26.56 U3.4 4.94,26.56 2.44,26.56 TP_GND.TP | U3.9 6.18,27.05 7.01,27.05 U3.6 7.15,26.98 7.5,26.98 8.26,26.22 8.26,24.28 8.05,24.07 J1.MP1 8.12,23.93 8.12,23.31 | 8.12,23.31 8.12,21.85 10.13,19.85 10.2,19.71 | 12.07,23.72 10.06,23.72 9.65,23.31 8.12,23.31 | EPD_C1.2 19.41,3.85 19.41,1.98 19.2,1.77 EPD_C5.2 19.13,1.57 18.58,1.01 17.82,1.01 17.33,1.5 EPD_C2.2 16.78,1.63 14.63,3.78 | 14.63,3.78 13.45,3.78 SW_DN.1 | 27.27,4.85 27.23,4.82 27.23,4.2 C9.2 27.3,4.06 27.72,3.64 27.72,1.63 EPD_C6.2 27.86,1.5 28.34,1.01 29.45,1.01 29.93,1.5 EPD_C8.2 30.07,1.63 30.07,4.13 EPD_C7.2 30.21,4.2 v31.66,4.2
  Top 0.3: 27.27,4.85 28.83,6.41 29.17,6.41 C42.1 | 26.68,5.44 26.68,6.34 C43.2 | 27.27,4.85 26.68,5.44 | 23.91,5.3 23.91,4.68 24.39,4.2 24.39,3.85 SW_ENT.1 | 23.91,5.3 23.91,5.72 | 23.91,5.72 C27.1 | 23.91,7.87 22.32,7.87 TP_BAT_GND.TP 22.11,7.87 21.07,8.91 19.62,8.91 19.13,8.42 | 23.91,7.87 24.67,7.87 24.81,8.01 25.09,8.01 C30.1 | 19.13,8.42 17.68,8.42 C1-EP-DR.2 | 23.91,7.87 23.91,5.72 | 23.91,5.3 24.6,5.3 24.67,5.37 26.54,5.37 26.68,5.44 | v15.95,5.93 14.7,4.68 14.7,3.92 14.63,3.78 | 19.13,8.42 v19.13,6.07 | SJ1.1 32.7,9.53 32.7,9.25 33.67,8.28 33.67,7.73 R_TYPE_SEL.1 33.81,7.59 v34.16,7.59 | 35.96,6.07 35.96,6.76 36.3,7.11 C15.2 | 35.96,6.07 35.96,5.79 | 35.96,5.79 35.96,5.37 C29.1 | 35.96,5.79 34.23,5.79 C16.2 34.16,5.93 v34.16,6.41 | 38.59,2.88 38.59,1.63 38.73,1.5 EPD_C9.2 38.87,1.57 40.94,1.57 41.64,2.26 C8.2 41.71,2.47 41.71,3.44 43.3,5.03 43.3,5.3 C33.2 43.44,5.44 43.44,7.17 C10.2 43.57,7.31 43.85,7.59 43.85,9.11 C11.2 43.99,9.25 43.99,11.19 C25.2 44.06,11.33 44.06,13.27 C21.2 43.99,13.48 43.78,13.68 43.78,16.18 C20.2 43.71,16.31 43.44,16.59 43.44,17.63 | 38.59,2.88 38.59,3.5 C7.2 38.66,3.64 39.07,4.06 39.07,6.21 D4.1 38.94,6.07 35.96,6.07 | 38.59,2.88 37.2,2.88 36.3,3.78 35.4,3.78 SW_UP.1 | J2.3 34.16,29.06 35.33,29.06 J2.5 35.54,29.06 35.75,29.06 36.3,29.61 37.55,29.61 | C4.2 42.61,31.83 43.02,31.41 43.44,31.41 R9.1 43.57,31.34 43.64,31.34 43.92,31.06 43.92,29.61 43.44,29.12 42.19,29.12 | 42.19,29.12 42.19,28.57 42.88,27.88 C22.2 42.95,27.74 42.95,25.59 C3.2 43.02,25.45 | 42.19,29.12 42.19,29.75 C24.1 42.05,29.61 37.55,29.61 | C18.2 36.65,22.82 36.65,20.68 36.72,20.61 36.72,20.05 C17.2 36.65,19.92 36.37,19.64 36.37,19.57 35.82,19.02 32.98,19.02 X1.2 32.84,18.95 32.84,16.31 C12.2 32.98,16.25 35.68,16.25 36.17,16.73 C13.2 36.23,16.87 37.76,16.87 37.83,16.94 C1.1 37.9,17.15 37.9,17.49 38.76,18.36
  Top 0.3: 38.76,18.36 37.9,19.22 C2.1 | 38.76,18.36 38.87,18.25 40.32,18.25 C31.1 40.32,18.12 40.32,17.98 40.67,17.63 43.44,17.63 | 43.44,17.63 43.44,18.95 C5.2 43.3,19.08 43.02,19.36
  Bottom 0.152: v28.32,7.91 28.32,7.18 v28.02,6.88
  Bottom 0.3: v29.45,21.23 29.45,21.51 28.96,21.99 25.99,21.99 U1.P$90 25.99,22.13 25.99,23.17 U1.P$86 | J4.SH3 27.3,29.68 27.3,26.98 25.99,25.66 U1.P$78 | v15.95,5.93 18.99,5.93 v19.13,6.07 | v34.16,7.59 v34.16,6.41 34.02,6.34 31.87,4.2 v31.66,4.2
N$1  (via drill 0.15)
  Top 0.15: v13.04,12.78 13.8,13.54 13.94,13.54 IC9.D1 | v13.04,11.88 10.61,9.46 v7.43,9.46 | v6.25,9.46 5.21,9.46 4.8,9.04 R4.2
  Bottom 0.15: v13.04,11.88 v13.04,12.78 | v6.25,9.46 v7.43,9.46
N$2  (via drill 0.15, 0.35)
  Top 0.15: v11.45,24.69 10.41,25.73 10.41,26.24 IC1.D1 | v24.88,16.31 25.16,16.31 25.36,16.52 26.33,16.52 26.68,16.18 28.9,16.18 29.03,16.31 30.9,16.31 31.6,15.62 v43.16,15.62 | v43.37,30.44 43.37,30.72 43.44,30.79 R9.2 | v44.77,24.64 44.28,24.15 41.94,24.15 41.64,23.85 40.09,23.85 40,23.95 39.8,23.76 39.8,20.67 40.21,20.27 41.37,20.27 41.7,20.6 43.09,20.6 43.45,20.24 v43.45,20.07
  Bottom 0.15: v11.45,24.69 19.82,16.31 v24.88,16.31 | v43.16,15.62 43.16,19.29 43.37,19.5 43.37,19.99 v43.45,20.07 | v43.37,30.44 44.77,29.03 v44.77,24.64
N$4
  Top 0.15: IC9.D2 14.42,13.61 IC9.D3
N$5  (via drill 0.15)
  Top 0.15: v7.43,9.81 10.55,9.81 13.94,13.2 IC9.E1 | v2.86,7.66 1.96,6.76 1.96,5.24 1.54,4.82 R2.2
  Bottom 0.15: v7.43,9.81 6.18,9.81 4.04,7.66 v2.86,7.66
N$6  (via drill 0.15)
  Top 0.15: IC9.E2 14.42,13.2 14.77,13.2 IC9.E3 14.84,13.27 v15.46,13.27 | v21.9,13.2 v19.62,13.2 | v42.26,11.95 42.95,11.26 C25.1 42.95,11.19 42.95,11.05 41.64,9.74 41.64,7.17 42.4,6.41 42.4,5.44 C33.1
  Bottom 0.15: v15.46,13.27 17.4,13.27 18.02,13.89 18.92,13.89 v19.62,13.2 | v21.9,13.2 22.87,13.2 29.59,19.92 30.49,19.92 41.57,30.99 41.71,30.99 43.77,28.93 43.77,24.63 41.33,24.63 40.17,23.47 40.17,20.75 40.35,20.57 41.93,20.57 42.17,20.33 42.17,12.04 v42.26,11.95
N$7
  Top 0.15: R17.1 38.31,24 38.17,23.86 38.1,23.86 37.97,23.72 37.97,22.62 38.52,22.06 R18.1
N$8
  Top 0.15: IC9.B2 14.42,14.45 14.77,14.45 IC9.B3
N$9  (via drill 0.15, 0.35)
  Top 0.15: IC9.A1 14.01,14.79 14.35,14.79 IC9.A2 14.42,14.79 14.77,14.79 IC9.A3 14.84,14.86 v15.12,14.58 | 27.09,8.77 27.09,8.84 25.16,10.78 25.16,11.47 24.46,12.16 22.39,12.16 v21.49,11.26 | 27.09,8.77 27.09,7.87 C23.1 | C24.2 43.09,29.82 42.61,30.3 41.38,30.3 41.27,30.2 v40.22,30.2 | v27.16,8.77 27.09,8.77 | v38.96,29.06 38.6,28.71 v38.6,26.23
  Bottom 0.15: v21.49,11.26 21.07,11.26 18.79,13.54 18.09,13.54 17.47,12.92 15.39,12.92 15.12,13.2 v15.12,14.58 | v27.16,8.77 31.66,8.77 39.28,16.38 39.28,19.86 38.6,20.54 v38.6,26.23 | v40.22,30.2 39.08,29.06 v38.96,29.06
N$10  (via drill 0.15)
  Top 0.15: v36.23,18.53 38.94,21.23 38.94,22.27 38.38,22.82 38.38,23.45 R17.2 | v29.59,17.84 28.27,16.52 26.75,16.52 25.78,17.49 24.6,17.49 TP_SCL.TP
  Bottom 0.15: v36.23,18.53 30.28,18.53 v29.59,17.84
N$11  (via drill 0.15)
  Top 0.15: v37.07,21.44 38.52,21.44 R18.2 | v31.8,20.82 30.42,20.82 29.59,21.65 29.31,21.65 v29.03,21.37 | v15.18,18.05 v16.85,19.71 | v13.45,7.11 14.28,6.27 TP_SDA.TP
  Bottom 0.15: v37.07,21.44 32.43,21.44 v31.8,20.82 | v29.03,21.37 18.51,21.37 v16.85,19.71 | v15.18,18.05 14.28,18.05 10.89,14.65 10.89,9.67 v13.45,7.11
N$14  (via drill 0.15)
  Top 0.15: v2.37,8.21 1.82,8.21 R3.2 | v8.19,13.48 v7.5,12.78 | v9.51,23.72 9.51,28.02 6.46,31.06 6.46,31.2 IC3.1
  Bottom 0.15: v2.37,8.21 4.18,8.21 6.18,10.22 7.15,10.22 7.5,10.57 v7.5,12.78 | v8.19,13.48 8.19,16.66 11.58,20.05 11.65,20.05 12.28,20.68 12.28,20.95 v9.51,23.72
N$17  (via drill 0.15)
  Top 0.15: v6.46,33.21 6.46,32.79 IC3.10 | v7.64,33.21 7.91,32.93 7.91,32.79 IC3.7 7.98,32.86 9.78,31.06 9.78,30.72 C19.1
  Bottom 0.15: v7.64,33.21 v6.46,33.21
N$21  (via drill 0.15)
  Top 0.15: v26.96,16.87 26.82,17.01 26.82,20.54 U1.P$AD23 | v34.3,12.23 34.85,12.23 35.33,11.74 35.68,11.74 39.77,7.66 39.77,3.23 C8.1
  Bottom 0.15: v26.96,16.87 26.96,15.48 26.54,15.07 26.54,14.93 29.24,12.23 v34.3,12.23
N$24  (via drill 0.15)
  Top 0.15: v29.24,19.08 28.34,19.98 28.34,22.62 27.44,23.52 U1.P$N24 | v27.72,15.35 27.72,11.26 28.9,10.08 v28.9,8.42 | v27.3,5.44 v28.27,6.41 | v26.54,4.68 26.54,4.47 26.26,4.2 C9.1
  Bottom 0.15: v29.24,19.08 29.24,16.87 v27.72,15.35 | v28.9,8.42 28.9,7.04 v28.27,6.41 | v26.54,4.68 v27.3,5.44
N$25
  Top 0.15: 30.35,24.9 30.35,21.92 31.11,21.16 31.87,21.16 32.84,20.19 X1.3 | 30.35,24.9 30.35,25.25 28.55,27.05 U1.P$A23 | 30.35,24.9 38.73,24.9 39.23,24.4 39.23,20.41 38.94,20.12 38.94,19.29 C2.2
N$26  (via drill 0.15, 0.35)
  Top 0.15: v29.31,25.45 27.79,25.45 27.16,24.83 26.89,24.83 U1.P$H23 | v35.61,25.45 41.81,25.45 C3.1 41.42,25.07 v41.42,25.01 | v40.25,10.15 L1.1
  Bottom 0.15: v35.61,25.45 v29.31,25.45 | v40.25,10.15 41.77,11.68 v41.77,20.26 40.85,20.26 v40.18,19.59 40.18,20.33 39.88,20.63 39.88,23.6 41.29,25.01 v41.42,25.01
N$27  (via drill 0.15)
  Top 0.15: v41.01,11.33 41.22,11.12 41.22,3.92 L1.2 | C22.1 41.98,27.74 v41.98,26.15 42.04,26.21 42.41,26.21 42.41,24.84 43.16,24.84 43.73,25.4 45.52,25.4 45.52,23.87 43.34,23.87 ANT1.1 | v41.64,30.65 41.64,31.83 C4.1
  Bottom 0.15: v41.01,11.33 41.01,15.76 41.43,16.18 41.43,18.74 41.32,18.84 40.34,18.84 39.57,19.61 39.57,23.74 v41.98,26.15 41.98,26.22 41.64,26.56 v41.64,30.65
N$28  (via drill 0.15)
  Top 0.15: 30.28,10.91 32.08,12.71 34.57,12.71 Q3.3 | 30.28,10.91 30.28,10.57 D5.2 | v18.16,7.17 18.16,6.21 C2-EP-DR.2 | 18.16,15.21 18.16,15.41 17.47,16.11 L5.1 | 18.16,15.21 v18.16,13.2 | v28.48,10.91 30.28,10.91 | 18.16,15.21 v18.85,15.21
  Bottom 0.15: v18.16,13.2 v18.16,7.17 | v28.48,10.91 23.15,10.91 v18.85,15.21
N$29  (via drill 0.15, 0.2)
  Top 0.15: v28.06,26.56 27.44,26.56 U1.P$B24 | v32.43,21.02 v31.8,21.65 | v32.09,19.26 32.09,19.06 X1.1 | v38.59,17.63 38.8,17.42 38.8,17.01 C1.2
  Bottom 0.15: v28.06,26.56 28.06,25.39 v31.8,21.65 | 32.43,19.98 v32.43,21.02 | v38.59,17.63 37.97,17.63 35.61,19.98 32.43,19.98 | v32.09,19.26 32.09,19.65 32.43,19.98
N$30  (via drill 0.15)
  Top 0.15: v27.23,25.87 26.89,25.87 U1.P$D23 | v29.86,20.26 29.86,19.29 v32.22,16.94 | v42.12,10.64 v37.62,15.14 | v42.88,9.88 42.88,9.18 C11.1
  Bottom 0.15: v27.23,25.87 27.23,24.28 29.86,21.65 v29.86,20.26 | v32.22,16.94 37,16.94 37.62,16.31 v37.62,15.14 | v42.88,9.88 v42.12,10.64
N$32  (via drill 0.15)
  Top 0.15: v22.8,21.02 22.18,21.02 U1.P$AC5 | v31.32,16.59 v28.55,19.36 | v37.27,16.25 42.74,16.25 C20.1
  Bottom 0.15: v22.8,21.02 26.89,21.02 v28.55,19.36 | v31.32,16.59 36.93,16.59 v37.27,16.25
N$33  (via drill 0.15)
  Top 0.15: U1.P$Y2 21.35,21.85 21.07,21.85 20.93,21.99 U1.P$W1 20.86,21.99 v20.17,21.99 | v15.6,21.99 14.56,21.99 13.32,20.75 v11.93,20.75 | v6.53,7.87 6.11,8.28 C6.1
  Bottom 0.15: v15.6,21.99 v20.17,21.99 | v11.93,20.75 11.58,20.4 11.51,20.4 7.85,16.73 7.85,9.18 v6.53,7.87
N$34  (via drill 0.15)
  Top 0.15: v19.55,26.49 20.86,26.49 U1.P$B1 | v13.52,19.64 v15.25,21.37 | v11.24,6 7.78,2.54 7.15,2.54 6.39,1.77 6.39,1.36 6.18,1.15 4.59,1.15 2.03,3.71 C14.1
  Bottom 0.15: v19.55,26.49 15.25,22.2 v15.25,21.37 | v13.52,19.64 13.52,18.12 10.2,14.79 10.2,7.04 v11.24,6
N$36
  Top 0.15: U1.P$A22 26.4,27.05 27.23,26.22 28.96,26.22 29.66,25.52 29.66,22.41 28.69,21.44 28.69,20.05 31.8,16.94 31.8,16.31 C12.1
N$39
  Top 0.15: U1.P$AD14 24.33,20.54 24.33,19.02 23.29,17.98 23.29,15.28 28.55,10.01 28.55,8.35 32.15,4.75 36.37,4.75 37.55,3.57 C7.1
N$43
  Top 0.15: L3.1 19.2,10.64 19.2,19.92 18.3,20.82 L2.2
N$44  (via drill 0.15)
  Top 0.15: 33.71,6.52 34.02,6.83 35.06,6.83 35.33,7.11 C15.1 35.4,7.17 35.96,7.73 36.65,7.73 37.14,7.24 v38.1,7.24 | 33.71,6.52 33.26,6.07 33.26,5.86 C16.1 | v41.98,7.24 42.47,7.24 C10.1 | v22.18,27.46 22.18,26.56 U1.P$B5 | v27.65,25.8 27.44,25.59 U1.P$E24 | 22.73,12.92 20.45,10.64 20.31,10.64 L3.2 | 22.73,12.92 22.73,18.81 21.35,20.19 20.59,20.19 19.13,21.65 v19.13,22.69 | 33.71,6.52 32.91,7.31 32.91,7.52 v30.56,9.88 | v23.22,12.51 22.8,12.92 22.73,12.92
  Bottom 0.15: v38.1,7.24 v41.98,7.24 | v27.65,25.8 27.65,26.56 28.13,27.05 28.13,30.58 27.65,31.06 25.78,31.06 v22.18,27.46 22.18,26.56 21.69,26.08 21.69,25.25 v19.13,22.69 | v30.56,9.88 29.93,9.88 27.3,12.51 v23.22,12.51
N$45  (via drill 0.15)
  Top 0.15: v36.79,25.8 35.54,25.8 35.33,25.59 30.97,25.59 29.17,27.39 25.71,27.39 25.43,27.12 U1.P$A18 | v37.07,18.95 37.07,18.67 35.27,16.87 C13.1
  Bottom 0.15: v36.79,25.8 36.79,22.13 37.41,21.51 37.41,21.37 37.14,21.09 36.23,21.09 35.96,20.82 35.96,20.05 v37.07,18.95
N$46  (via drill 0.15)
  Top 0.15: v17.82,6.83 17.19,6.21 C2-EP-DR.1 | v25.36,9.11 v24.53,8.28 | v35.96,13.48 37.41,13.48 D2.1 37.41,13.41 39.07,11.74 39.07,9.81 D4.2
  Bottom 0.15: v17.82,6.83 23.08,6.83 v24.53,8.28 | v25.36,9.11 31.6,9.11 v35.96,13.48
N$47  (via drill 0.15)
  Top 0.15: v20.72,20.88 19.82,21.78 19.82,24.49 20.72,25.39 21,25.39 21.07,25.32 21.35,25.32 U1.P$F2 | v25.43,16.18 25.43,14.93 25.92,14.45 X2.1 25.99,14.45 26.54,15 v26.89,15 | v36.3,20.47 35.75,21.02 35.75,22.82 C18.1
  Bottom 0.15: v25.43,16.18 v20.72,20.88 | v36.3,20.47 36.3,20.33 38.94,17.7 38.94,17.56 38.66,17.28 30.83,17.28 28.55,15 v26.89,15
N$48  (via drill 0.15)
  Top 0.15: v19.48,23.45 19.48,21.72 20.66,20.54 21.35,20.54 U1.P$AD2 | v42.81,13.89 42.81,13.54 C21.1
  Bottom 0.15: v19.48,23.45 19.48,26.01 26.19,32.73 29.93,32.73 30.97,33.76 41.63,33.76 45.27,30.13 45.27,23.85 40.95,23.85 40.47,23.37 40.47,20.86 43.02,20.86 43.02,19.57 42.81,19.36 v42.81,13.89
N$49  (via drill 0.15)
  Top 0.15: v21.42,26.22 21.42,25.87 U1.P$D2 | v32.22,22.13 34.3,20.05 35.75,20.05 C17.1 35.68,19.98 v35.68,19.43 | v29.1,15.97 28.48,15.35 28.48,14.45 X2.2
  Bottom 0.15: v21.42,26.22 21.42,27.12 25.71,31.41 27.72,31.41 28.96,30.16 28.96,25.39 v32.22,22.13 | v29.1,15.97 31.32,18.18 36.3,18.18 36.58,18.46 36.58,18.6 35.75,19.43 v35.68,19.43
N$50  (via drill 0.15, 0.35)
  Top 0.15: v20.52,26.08 20.86,26.08 U1.P$C1 | C5.1 42.47,19.02 42.61,19.15 v42.61,19.57 42.72,19.69 42.72,20.3 42.39,19.97 39.83,19.97 39.52,20.27 39.52,23.89 39.88,24.24 v41.49,24.24
  Bottom 0.15: v20.52,26.08 20.52,26.63 25.64,31.76 29.93,31.76 30.97,30.72 35.47,30.72 36.3,31.55 41.57,31.55 44.05,29.07 44.05,24.33 41.57,24.33 v41.49,24.24
N$52
  Top 0.15: R_TYPE_SEL.2 33.74,7.17 34.3,7.17 34.57,7.45 34.57,9.18 34.23,9.53 SJ1.2 34.64,9.18 34.92,9.18 35.82,10.08 R1_EP_DR.1
N$57
  Top 0.15: EPD_C2.1 16.78,0.6 19.06,0.6 19.96,1.5 19.96,4.68 18.65,6 18.65,7.11 17.89,7.87 16.29,7.87 15.81,8.35 15.81,14.65 11.58,18.88 11.58,21.09 10.96,21.72 10.68,21.72 J1.4
N$58  (via drill 0.15)
  Top 0.15: v18.09,4.47 18.44,4.13 EPD_C1.1 | v11.24,19.29 11.24,20.95 10.96,21.23 10.68,21.23 J1.5
  Bottom 0.15: v18.09,4.47 12.35,4.47 9.85,6.97 9.85,17.91 v11.24,19.29
N$59
  Top 0.15: J4.A9_B4 20.66,29.12 20.66,28.71 21,28.36 25.02,28.36 25.36,28.71 25.36,29.12 J4.A4_B9
N$60  (via drill 0.15)
  Top 0.15: v24.33,7.45 24.33,5.79 C27.2 | v4.45,27.05 5.01,27.05 U3.3 5.01,27.12 5.01,27.53 U3.2
  Bottom 0.15: v24.33,7.45 24.33,7.66 24.88,8.21 24.88,8.35 15.95,17.28 15.95,17.7 6.6,27.05 v4.45,27.05
N$62
  Top 0.15: U1.P$B3 21.35,26.56 21,26.91 18.58,26.91 17.33,25.66 17.33,20.88 L2.1
N$65  (via drill 0.15)
  Top 0.15: v6.81,28.92 3,28.92 R2_USB.1 | v21,29.96 21.21,29.75 21.21,29.19 J4.B5
  Bottom 0.15: v6.81,28.92 17.89,28.92 18.37,28.43 19.48,28.43 v21,29.96
N$66
  Top 0.15: R1_USB.2 17.47,28.99 17.61,29.12 17.68,29.12 17.89,29.33 17.89,30.58 18.37,31.06 22.87,31.06 24.26,29.68 24.26,29.19 J4.A5
N$68  (via drill 0.15)
  Top 0.15: v15.05,12.85 15.05,7.38 16.78,5.65 16.85,5.65 17.75,4.75 17.75,3.71 18.16,3.3 18.16,1.63 EPD_C5.1 | v13.11,14.86 12.83,14.86 12,15.69 10.68,15.69 J1.16 10.68,15.76 10.68,16.18 J1.15
  Bottom 0.15: v15.05,12.85 13.11,14.79 v13.11,14.86
N$70  (via drill 0.15)
  Top 0.15: v25.02,4.4 26.75,2.67 26.75,1.63 EPD_C6.1 | v25.02,6.69 25.02,6.9 25.85,7.73 25.85,9.04 25.36,9.53 v16.15,9.53 | v11.24,14.58 11.1,14.58 10.96,14.72 10.68,14.72 J1.18
  Bottom 0.15: v25.02,6.69 v25.02,4.4 | v16.15,9.53 14.98,9.53 11.24,13.27 v11.24,14.58
N$71  (via drill 0.15)
  Top 0.15: v29.1,5.1 29.1,4.2 EPD_C7.1 | v15.18,16.94 v16.71,16.94 | v11.58,14.51 11.31,14.24 10.68,14.24 J1.19
  Bottom 0.15: v29.1,5.1 25.43,8.77 24.88,8.77 v16.71,16.94 | v15.18,16.94 14.01,16.94 v11.58,14.51
N$72  (via drill 0.15)
  Top 0.15: v28.62,5.1 28.62,3.78 29.03,3.37 29.03,1.63 EPD_C8.1 | v11.58,13.68 10.68,13.68 J1.20
  Bottom 0.15: v28.62,5.1 26.33,7.38 24.67,7.38 23.77,6.48 17.75,6.48 16.57,7.66 16.57,10.08 12.97,13.68 v11.58,13.68
N$73  (via drill 0.15)
  Top 0.15: v37.76,2.47 37.76,1.5 EPD_C9.1 | v35.4,10.08 34.92,10.57 v31.04,10.57 | v22.66,11.81 22.46,11.81 20.66,10.01 v16.22,10.01 | v11.58,13.34 10.75,13.34 10.68,13.27 J1.21
  Bottom 0.15: v37.76,2.47 37.76,7.73 v35.4,10.08 | v31.04,10.57 29.66,10.57 27.37,12.85 23.15,12.85 22.66,12.37 v22.66,11.81 | v16.22,10.01 12.9,13.34 v11.58,13.34
N$74  (via drill 0.15)
  Top 0.15: v16.5,32.66 16.02,33.14 EPD_C10.1 | v17.75,25.11 17.75,19.92 v14.35,16.52 | v11.93,14.1 11.93,13.27 11.45,12.78 10.68,12.78 J1.22
  Bottom 0.15: v16.5,32.66 18.72,32.66 21.35,30.02 21.35,28.71 v17.75,25.11 | v11.93,14.1 v14.35,16.52
N$75  (via drill 0.15)
  Top 0.15: v7.85,24.42 7.5,24.76 2.44,24.76 1.2,26.01 1.2,30.72 4.66,34.18 12.14,34.18 15.25,31.06 15.81,31.06 EPD_C11.1 | v7.85,17.15 7.85,14.72 10.27,12.3 10.61,12.3 J1.23
  Bottom 0.15: v7.85,17.15 v7.85,24.42
N$76  (via drill 0.15)
  Top 0.15: v9.65,31.62 12.76,31.62 EPD_C12.1 | v7.5,14.58 10.34,11.74 10.61,11.74 J1.24
  Bottom 0.15: v9.65,31.62 8.05,31.62 4.11,27.67 4.11,26.98 6.32,24.76 7.15,24.76 7.5,24.42 v7.5,14.58
N$78  (via drill 0.15)
  Top 0.15: v9.16,24.9 9.16,26.98 6.39,29.75 2.58,29.75 C34.2 | v12.97,21.09 12.97,21.37 IC2.C2
  Bottom 0.15: v12.97,21.09 v9.16,24.9
N$81  (via drill 0.15)
  Top 0.15: v4.45,27.6 3.07,27.6 1.75,28.92 1.75,30.86 2.31,31.41 2.65,31.41 2.86,31.2 2.86,31.06 C32.2 | v12.76,22.69 12.97,22.48 IC2.A2
  Bottom 0.15: v4.45,27.6 7.43,27.6 7.64,27.81 8.05,27.81 11.1,24.76 11.1,24.35 v12.76,22.69
N$84
  Top 0.15: 20.52,5.37 21.69,5.37 21.83,5.24 R7.2 | 20.52,5.37 19.82,5.37 R5.2 | 20.52,5.37 20.52,5.93 19.89,6.55 19.89,7.87 R8.2
P0.13/1.5D  (via drill 0.15)
  Top 0.15: v24.67,6.97 25.5,7.8 25.5,8.01 C30.2 | v20.17,5.86 19.89,5.86 19.82,5.93 R5.1 | v28.13,5.17 28.41,5.44 30.97,5.44 32.57,3.85 SW_UP.2
  Bottom 0.15: v20.17,5.86 23.56,5.86 v24.67,6.97 24.74,6.97 24.81,7.04 26.13,7.04 27.99,5.17 v28.13,5.17
P0.14/1.5D  (via drill 0.15)
  Top 0.15: v41.08,18.05 40.94,18.18 40.81,18.18 C31.2 | v22.18,3.23 21.62,3.78 SW_ENT.2 21.62,3.85 21.62,4.13 22.59,5.1 22.59,5.72 21.14,7.17 21.14,7.31 20.03,8.42 19.89,8.42 R8.1
  Bottom 0.15: v41.08,18.05 41.08,16.25 28.06,3.23 v22.18,3.23
P1.01/1.6C
  Top 0.15: R_PWR_EPD.1 12.48,7.31 11.31,7.31 10.68,7.94 9.71,7.94 7.85,6.07 7.85,3.92 5.77,1.84 Q1.1
P1.02/1.6C  (via drill 0.15)
  Top 0.15: v36.58,5.03 36.58,5.1 36.37,5.3 C29.2 | v27.93,4.06 v28.62,3.37 | v22.25,5.51 22.04,5.72 21.9,5.72 R7.1 | v12,5.51 10.61,4.13 10.61,3.85 SW_DN.2
  Bottom 0.15: v36.58,5.03 33.26,5.03 31.6,3.37 v28.62,3.37 | v27.93,4.06 23.7,4.06 v22.25,5.51 v12,5.51
RESE
  Top 0.15: R1_EP_DR.2 36.37,9.6 36.51,9.74 36.58,9.74 36.72,9.88 36.72,10.29 35.61,11.4 33.19,11.4 32.57,12.02 Q3.2
SCL/1.4C  (via drill 0.15)
  Top 0.15: v11.24,23.31 11.24,22.55 12.35,21.44 12.48,21.44 IC2.C1 | v7.64,27.39 7.22,27.39 7.08,27.53 U3.7
  Bottom 0.15: v11.24,23.31 7.64,26.91 v7.64,27.39
SDA/1.4C  (via drill 0.15)
  Top 0.15: v12.76,22.2 12.97,21.99 IC2.B2 | v7.98,27.46 7.43,28.02 7.08,28.02 U3.8
  Bottom 0.15: v12.76,22.2 7.98,26.98 v7.98,27.46
SWDCLK
  Top 0.15: U1.P$AA24 27.44,21.51 27.99,20.95 27.99,18.05 TP_SWDCLK.TP
SWO
  Top 0.15: TP_SWO.TP 6.67,6.48 7.85,6.48 10.48,9.11 13.8,9.11 TP_VREG.TP
VBAT/2.5C
  Top 0.152: IC1.C2 13.38,27.66 14.37,28.65 14.92,28.65 15.05,28.52 15.05,27.99 C37.2
VBUS/1.5D
  Top 0.3: C42.2 29.66,6.48 29.66,6.69 28.91,7.44 26.66,7.44 25.64,6.41 C43.1
VBUS/2.6D  (via drill 0.35)
  Top 0.076: IC1.A2 11.82,29.2 11.83,29.21 11.59,29.45 10.99,29.45 10.29,28.75 v10.29,26.87 | v12.24,26.47 12.24,26.02 C38.2
  Bottom 0.076: v10.29,26.87 10.68,26.47 v12.24,26.47
VREG
  Top 0.152: IC1.B2 12.88,28.06 C39.1